# Allegro board HY_1R3TFT_V10.brd
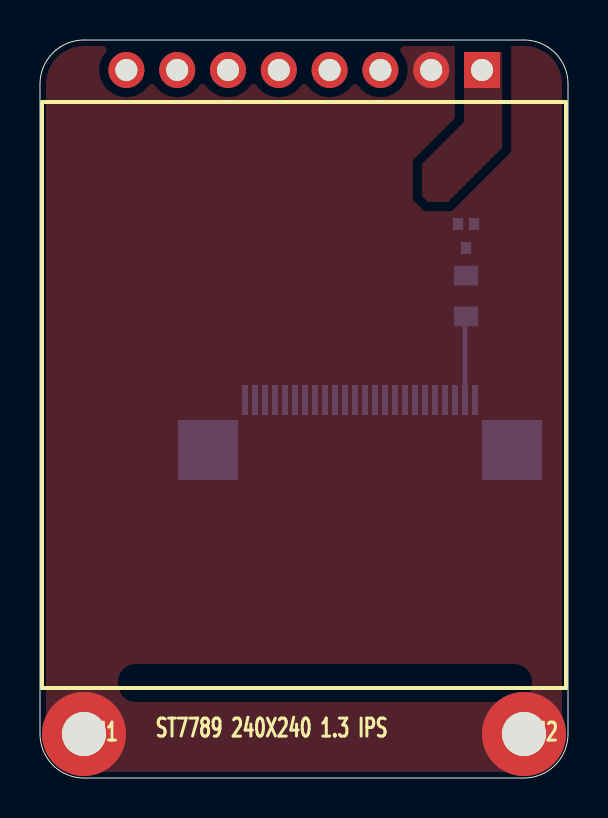
[diagram p0: board, top side]
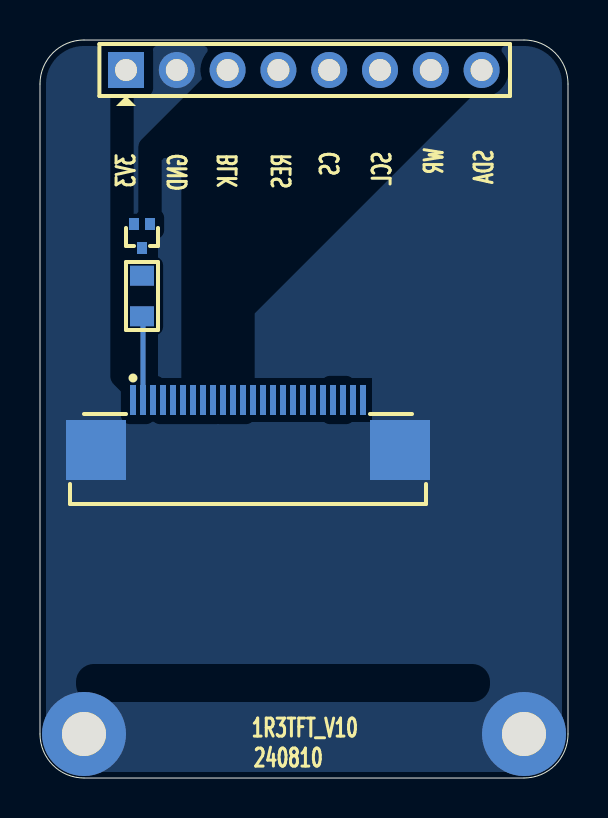
[diagram p1: board, bottom side, seen from below]

Outline 26.4 x 36.9 mm; copper layers: TOP, BOTTOM. Coordinates in mm from the lower left corner of the outline.
Outline path: 0,34.7 arc(0.64,36.26) 2.2,36.9 24.2,36.9 arc(25.76,36.26) 26.4,34.7 26.4,2.2 arc(25.76,0.64) 24.2,0 2.2,0 arc(0.64,0.64) 0,2.2 0,34.7

## Design rules (mm)
constraint set DEFAULT: min track width 0.203, pair gap 0.203

## Placement (name value [footprint] x y rotation side)
J1  0.5K-AS-24PWBG  [0R5K-AS-24PWBG]  16 18.9 180 bottom
J2  -  [CN1X8-2P54-Z]  22.1 35.4 180 bottom
MH1  Hold-M2/NI  [HOLD4R20X2R20]  2.2 2.2 0 top
MH2  Hold-M2/NI  [HOLD4R20X2R20]  24.2 2.2 0 top
NOREF  -  []  0 0 90 top
NOREF#2  -  []  0 0 90 top
NOREF#3  -  []  0 0 90 top
NOREF#4  -  []  0 0 0 top
NOREF#5  -  []  0 0 0 top
NOREF#6  -  []  0 0 0 top
NOREF#7  -  []  0 0 0 top
Q1  DTC043ZMT2L  [SOT723]  21.3 27.1 0 bottom
R1  10R  [R0805]  21.3 24.1 90 bottom

## Library data of the parts
J1 = 0.5K-AS-24PWBG
J2 = CONN RCPT 8
MH1 MH2 = Hold_1
Q1 = DTC043ZMT2L
R1 = R_Generic

## Footprints (pads in the part's own frame, mm; a bottom-side part is the same pattern mirrored in y, then rotated)
0R5K-AS-24PWBG
  rect 0.3x1.5 smd: 1(-5.75,0) 2(-5.25,0) 3(-4.75,0) 4(-4.25,0) 5(-3.75,0) 6(-3.25,0) 7(-2.75,0) 8(-2.25,0) 9(-1.75,0) 10(-1.25,0) 11(-0.75,0) 12(-0.25,0) 13(0.25,0) 14(0.75,0) 15(1.25,0) 16(1.75,0) 17(2.25,0) 18(2.75,0) 19(3.25,0) 20(3.75,0) 21(4.25,0) 22(4.75,0) 23(5.25,0) 24(5.75,0)
  rect 3x3 smd: 25(7.6,-2.5) 26(-7.6,-2.5)
CN1X8-2P54-Z
  rect 1.8x1.8 hole 1.1: 1(0,0)
  round 1.8 hole 1.1: 2(2.54,0) 3(5.08,0) 4(7.62,0) 5(10.16,0) 6(12.7,0) 7(15.24,0) 8(17.78,0)
HOLD4R20X2R20
  round 4.2 hole 2.2: 1(0,0)
R0805
  rect 1x1.2 smd: 1(-1.016,0) 2(1.016,0)
SOT723
  rect 0.5x0.6 smd: 1(-0.4,-0.6) 2(0.4,-0.6) 3(0,0.6)

## Nets
LEDK: J1.2 R1.1

Pads without a net: J1 1 3 4 5 6 7 8 9 10 11 12 13 14 15 16 17 18 19 20 21 22 23 24 25 26; J2 1 2 3 4 5 6 7 8; MH1 1; MH2 1; Q1 1 2 3; R1 2

## Routing (per net, layer and track width the routed paths; a pad name or vN(x,y) marks a point on that pad's centre or on a via; arc(x,y) is an arc through that point)
LEDK: length 4.2
  BOTTOM w0.254: R1.1 21.25,23.03 J1.2

## Copper pours and planes (outline as drawn; the poured copper is in the pictures)
(no net) on TOP: 26.1,2.2 25.54,0.86 24.2,0.3 2.2,0.3 0.86,0.86 0.3,2.2 0.3,34.7 0.86,36.04 2.2,36.6 24.2,36.6 25.54,36.04 26.1,34.7
(no net) on TOP: 21.2,36.3 21.2,32.8 19.1,30.7 19.1,29.1 19.4,28.8 20.4,28.8 23.1,31.5 23.1,36.3
(no net) on BOTTOM: 20.5,20.1 20.5,30.7 20.2,31 19.4,31 19.1,30.7 19.1,20.1 19.2,20 20.4,20
(no net) on BOTTOM: 26.1,2.2 25.54,0.86 24.2,0.3 2.2,0.3 0.86,0.86 0.3,2.2 0.3,34.7 0.86,36.04 2.2,36.6 24.2,36.6 25.54,36.04 26.1,34.7 ; 6 cut-outs

## Text on the board
Ref Des/Silkscreen Bottom: 240810 | 1R3TFT_V10 | SDA | WR | SCL | CS | RES | BLK | GND | 3V3
Ref Des/Silkscreen Top: ST7789 240X240 1.3 IPS
DISPLAY_BOTTOM: FIGURE | FINISHED_SIZE | 0.254 | 0.3048 | 1.1 | 2.2 | DRILL CHART: TOP to BOTTOM | ALL UNITS ARE IN MILLIMETERS | PLATED | QTY | 4 | 37 | 8 | 2 | 51 | TOTAL HOLES:
